# Altium PCB LEDs.PcbDoc
Units mm, origin at the board's own origin, x right, y up, seen from the top; angles counter-clockwise.
Board outline 152.4 x 101.6 mm, 2 copper layers (Top Layer, Bottom Layer); 18 components, 31 nets, 90 pads, 0 vias.
Unrouted connection lines stored in the file: 1.
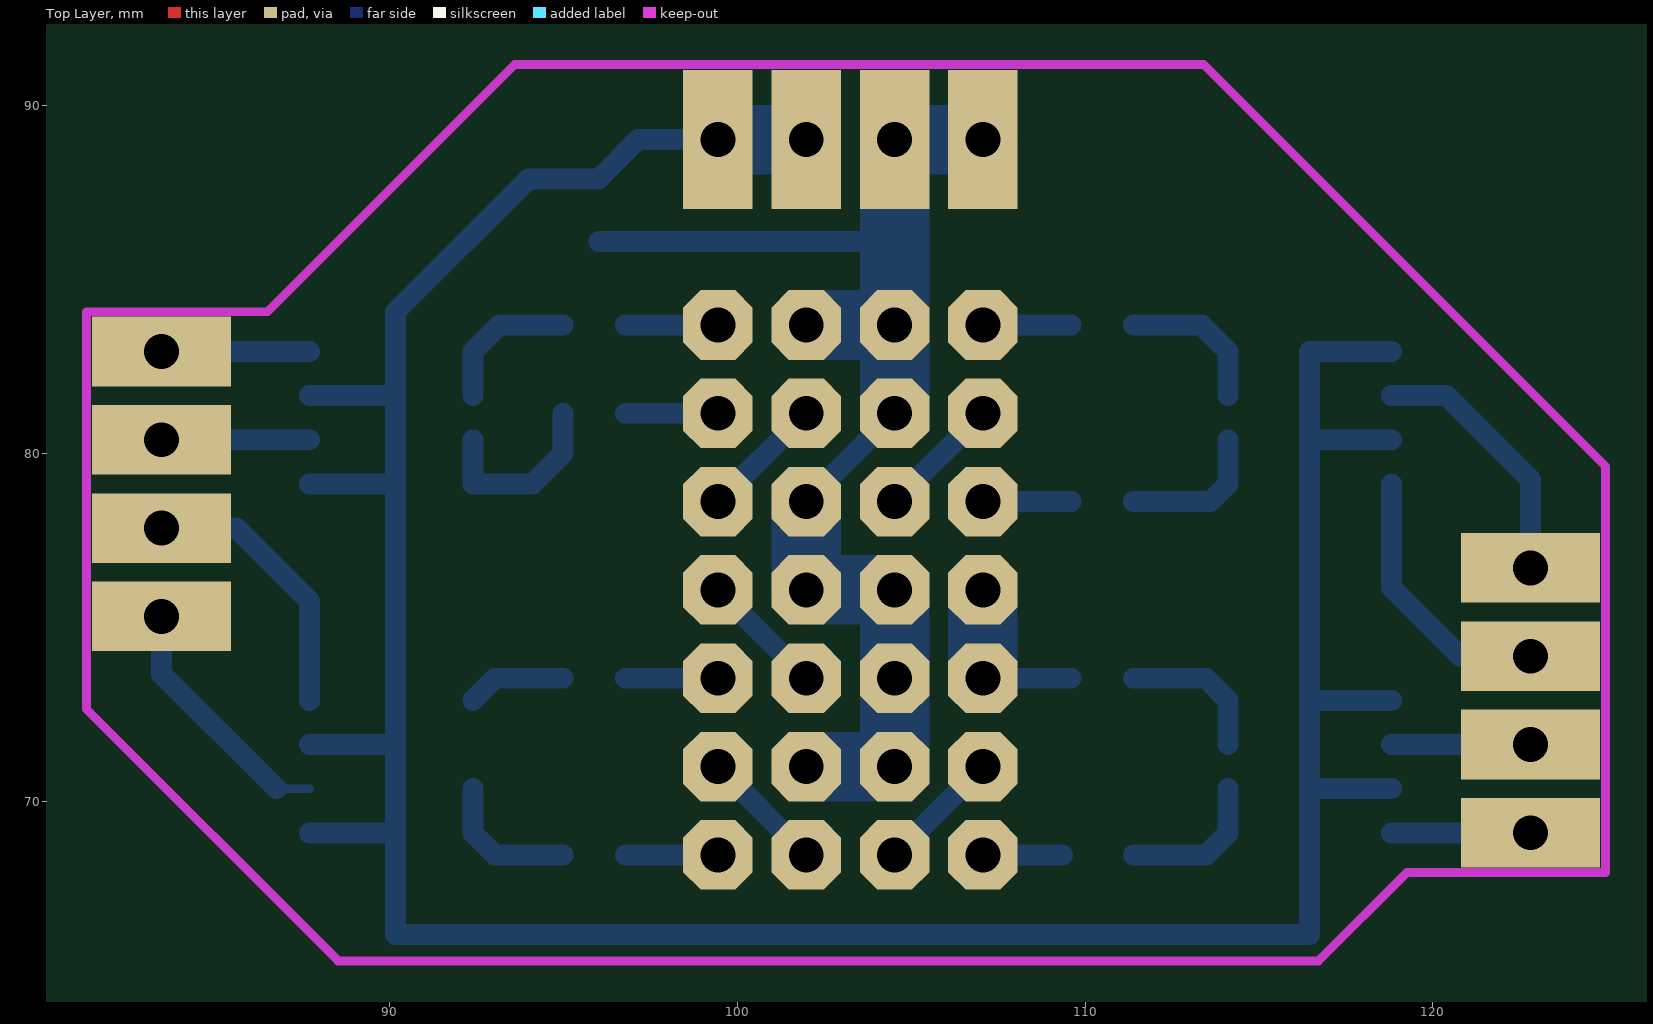
[diagram p0: Top Layer view]
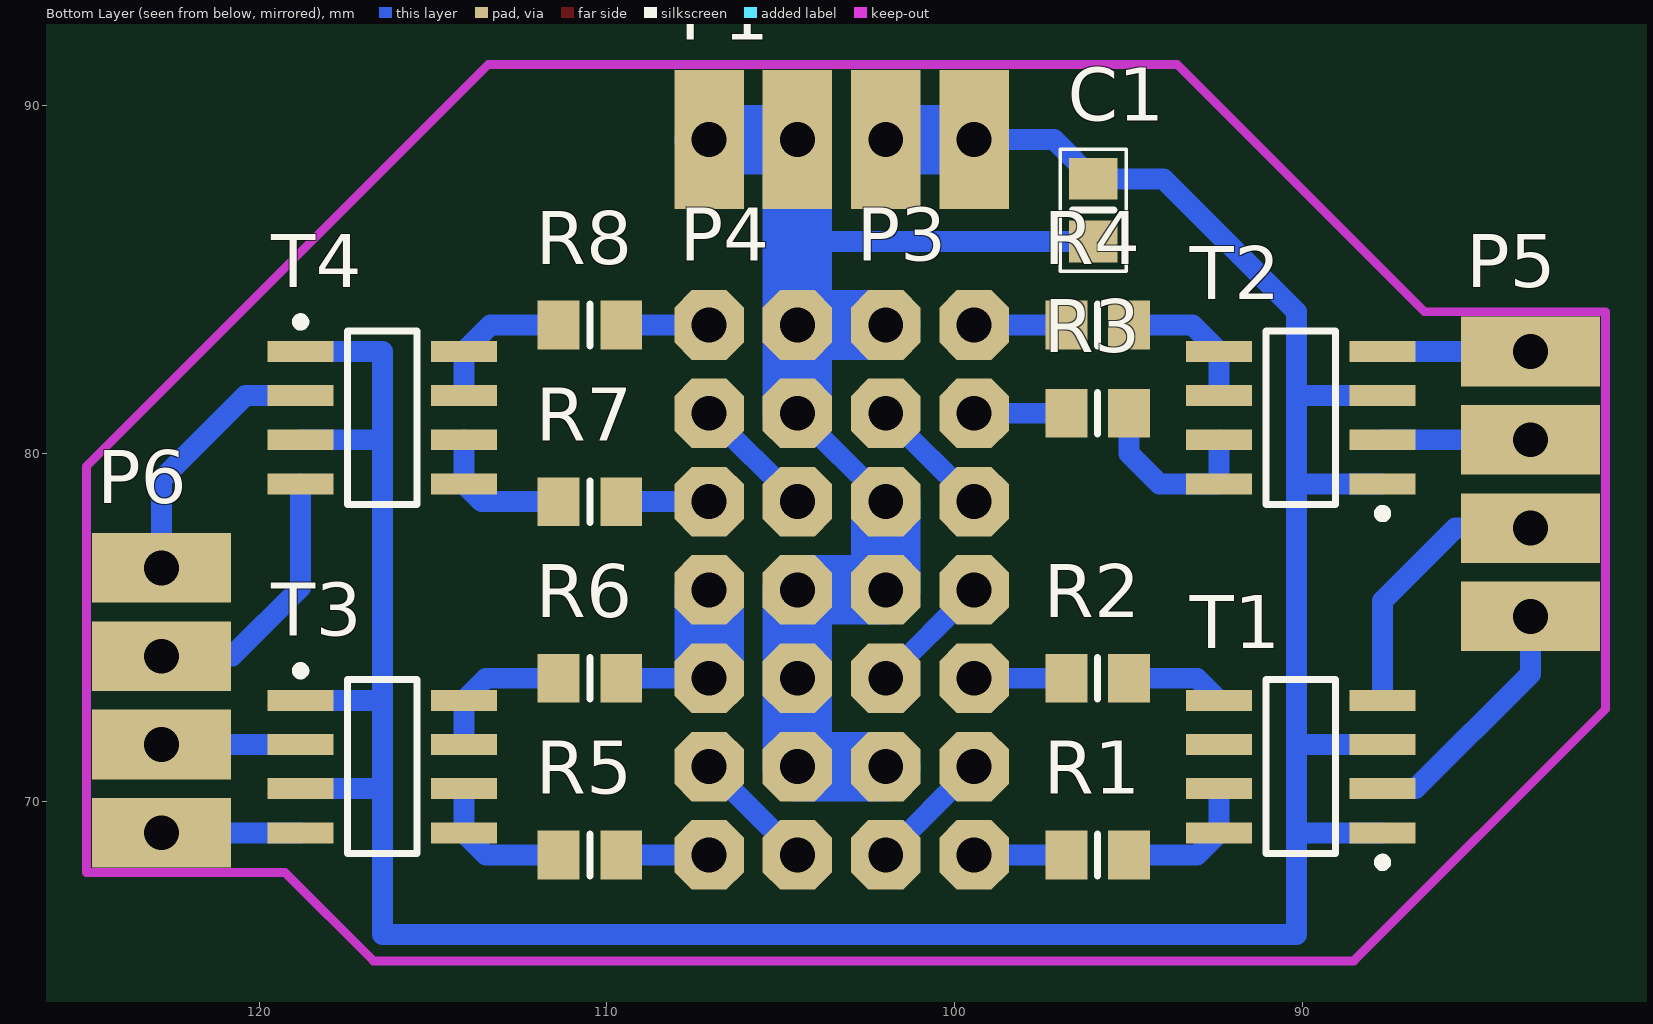
[diagram p1: Bottom Layer view, seen from below]
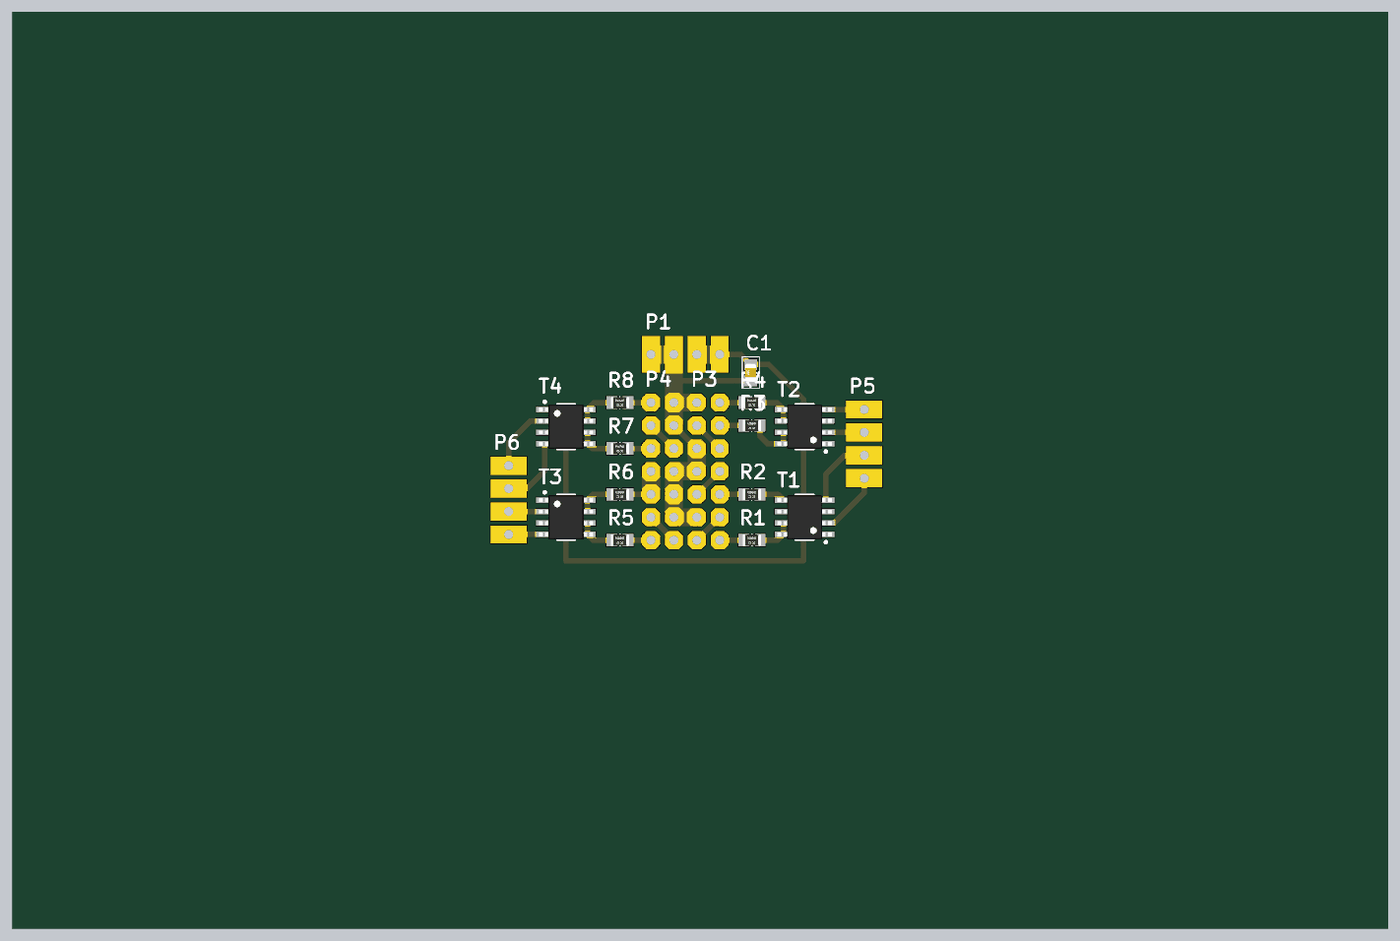
[diagram p2: 3D render of the assembled board from below, using the file's embedded part models]

## Layer stack, top to bottom
Top Solder: solder mask 0.0102, Solder Resist, Dk 3.5
Top Layer: signal copper 0.0356
Dielectric 1: dielectric 0.32, FR-4, Dk 4.8
Bottom Layer: signal copper 0.0356
Bottom Solder: solder mask 0.0102, Solder Resist, Dk 3.5

## Board outline
25.4,25.4 177.8,25.4 177.8,127 25.4,127

## Design rules (kind name [scope] priority, off if disabled: settings)
Clearance [All] p1: gap=0.254
PolygonConnect [All] p1: connectstyle=Relief reliefconductorwidth=0.254 reliefentries=4 polygonreliefangle="90 Angle" airgapwidth=0.254
RoomDefinition LEDs [InComponentClass('LEDs')] p1: confinementstyle=ConfineIn formatcopy=TRUE lockcomponents=FALSE outline 0,0 50.8,0 50.8,25.4 0,25.4
RoutingVias [All] p1: holewidth=0.711 width=1.27 viastyle="Through Hole" minholewidth=0.711 minwidth=1.27 maxholewidth=0.711 maxwidth=1.27
SolderMaskExpansion [All] p1: expansion=0.102
UnpouredPolygon [All] p1: allowunpoured=FALSE
Width [All] p1: maxlimit=3 minlimit=0.2 preferedwidth=0.6
29 further rules are at their usual default settings.

## Components (designator, comment, footprint, x,y, rotation, side; value= is the part's Value field where it differs from the comment)
C1 "1uF" "C 0805 / 2012" 96.012,86.995 r90 bottom
P1 "Header 4x1" "HEADER 4X1 2.54MM" 104.521,89.027 r0 bottom
P3 "Header 2x7" "HEADER 7X2 2.54MM" 99.441,73.533 r90 bottom
P4 "Header 2x7" "HEADER 7X2 2.54MM" 104.521,73.533 r90 bottom
P5 "Header 4x1" "HEADER 4X1 2.54MM" 83.439,80.391 r90 bottom
P6 "Header 4x1" "HEADER 4X1 2.54MM" 122.809,74.168 r90 bottom
R1 "100R" "R 0805 / 2012" 95.885,68.453 r0 bottom
R2 "62R" "R 0805 / 2012" 95.885,73.533 r0 bottom
R3 "82R" "R 0805 / 2012" 95.885,81.153 r0 bottom
R4 "68R" "R 0805 / 2012" 95.885,83.693 r0 bottom
R5 "82R" "R 0805 / 2012" 110.49,68.453 r0 bottom
R6 "68R" "R 0805 / 2012" 110.49,73.533 r0 bottom
R7 "160R" "R 0805 / 2012" 110.49,78.613 r0 bottom
R8 "68R" "R 0805 / 2012" 110.49,83.693 r0 bottom
T1 "IRF7341" SOIC8 90.043,70.993 r0 bottom
T2 "IRF7341" SOIC8 90.043,81.026 r0 bottom
T3 "IRF7341" SOIC8 116.459,70.993 r180 bottom
T4 "IRF7341" SOIC8 116.459,81.026 r180 bottom

## Footprints (in the part's own frame and the unit in brackets; to place one, negate y for a bottom-side part, rotate by r counter-clockwise, add the part's x,y. Pads: shape width x height; smd on the part's side, far side on the other; paste and mask are expansions set on the pad)
"C 0805 / 2012" [mm] "Capacitor 0805 / 2012 (2.0 x 1.2 mm)"
  rect 1.2x1.4 smd: 1(-0.9,0) 2(0.9,0)
  silkscreen extent -1.75,-0.95 1.75,0.95, body extent -1,-0.62 1,0.63, height 0.78
"HEADER 4X1 2.54MM" [mm]
  rect 2x4 hole 1: 1(-5.08,0) 2(-2.54,0) 3(0,0) 4(2.54,0)
"HEADER 7X2 2.54MM" [mm]
  oct 2x2 hole 1: 1(-5.08,0) 2(-5.08,2.54) 3(-2.54,0) 4(-2.54,2.54) 5(0,0) 6(0,2.54) 7(2.54,0) 8(2.54,2.54) 9(5.08,0) 10(5.08,2.54) 11(7.62,0) 12(7.62,2.54) 13(10.16,0) 14(10.16,2.54)
"R 0805 / 2012" [mm] "Resistor 0805 / 2012 (2.0 x 1.2 mm)"
  rect 1.2x1.4 smd: 1(-0.9,0) 2(0.9,0)
  silkscreen extent 0,-0.6 0,0.6, body extent -1,-0.63 1,0.62, height 0.45
SOIC8 [mm] "SOIC, 8-Leads, Body 4.9x3.9mm, Pitch 1.27mm, IPC High Density"
  rect 1.9x0.6 smd: 1(-2.35,1.905) 2(-2.35,0.635) 3(-2.35,-0.635) 4(-2.35,-1.905) 5(2.35,-1.905) 6(2.35,-0.635) 7(2.35,0.635) 8(2.35,1.905)
  silkscreen extent -2.47,-2.5 1,2.88, body extent -3,-2.45 3,2.45, height 1.75

## Part data
C1: library part Capacitor
R1 R2 R3 R4 R5 R6 R7 R8: library part Resistor, "Resistor"

## Nets (pads, with @x,y where several pads share a name; then routed paths per layer and width w, separated by ;. In a path a pad name is that pad's centre, name@x,y a point inside that pad or via, vN(x,y) a via of type N, cw(c..) or ccw(c..) an arc to the next point about the centre after c; other vN are vias at no path point)
BLUE: P4.6 P4.8 R6.1 | length 5.1
  Bottom Layer w0.6: P4.6 R6.1
  Bottom Layer w2: P4.6 P4.8
"DRAIN BLUE": R6.2 T3.7 T3.8 | length 4.3
  Bottom Layer w0.6: R6.2 113.474,73.533 T3.8 T3.7
"DRAIN RED": R7.2 T4.5 T4.6 | length 4.2
  Bottom Layer w0.6: R7.2 113.601,78.613 T4.5 T4.6
"DRAIN WHITE 2": R8.2 T4.7 T4.8 | length 4.3
  Bottom Layer w0.6: R8.2 113.347,83.693 T4.8 T4.7
"DRAIN YELLOW 2": R5.2 T3.5 T3.6 | length 4.3
  Bottom Layer w0.6: R5.2 113.474,68.453 T3.5 T3.6
GND: C1.2 P1.1 P1.2 T1.1 T1.3 T2.1 T2.3 T3.1 T3.3 T4.1 T4.3 | length 94
  Bottom Layer w0.254: 116.459,82.931 116.586,82.931
  Bottom Layer w0.6: T1.1 90.17,69.088 ; T1.3 90.17,71.628 ; T2.1 90.043,79.121 ; T2.3 90.17,81.661 ; P1.1 97.144,89.027 C1.2 93.991,87.895 90.17,84.074 90.17,66.167 116.459,66.167 116.459,82.931 ; 116.459,70.358 T3.3 ; 116.459,72.898 T3.1 ; 116.459,80.391 T4.3 ; 116.586,82.931 T4.1
  Bottom Layer w2: P1.1 P1.2
GREEN: P3.5 R2.2 | length 2.7
  Bottom Layer w0.6: R2.2 P3.5
LED1: P5.1 T1.2 | length 7.4
  Bottom Layer w0.254: P5.1@83.82,74.676 P5.1@83.883,74.613 ; 86.741,70.358 T1.2
  Bottom Layer w0.6: P5.1 83.439,73.66 86.741,70.358
LED2: P5.2 T1.4 | length 8
  Bottom Layer w0.6: P5.2 85.598,77.851 87.693,75.756 T1.4
LED3: P5.3 T2.2 | length 4.3
  Bottom Layer w0.6: P5.3 T2.2
LED4: P5.4 T2.4 | length 4.3
  Bottom Layer w0.6: P5.4 T2.4
LED5: P6.2 T3.2 | length 4
  Bottom Layer w0.6: T3.2 P6.2
LED6: P6.1 T3.4 | length 4
  Bottom Layer w0.6: T3.4 P6.1
LED7: P6.4 T4.2 | length 7.5
  Bottom Layer w0.6: T4.2 120.396,81.661 122.809,79.248 P6.4
LED8: P6.3 T4.4 | length 7.8
  Bottom Layer w0.6: T4.4 118.809,76.136 120.777,74.168 P6.3
NetP3_2: P3.2 P3.3 | length 3.6
  Bottom Layer w0.6: P3.3 P3.2
NetP3_6: P3.6 P3.7 | length 3.6
  Bottom Layer w0.6: P3.7 P3.6
NetP3_9: P3.9 P3.12 | length 3.6
  Bottom Layer w0.6: P3.9 P3.12
NetP4_1: P4.1 P4.4 | length 3.6
  Bottom Layer w0.6: P4.1 P4.4
NetP4_9: P4.9 P4.12 | length 3.6
  Bottom Layer w0.6: P4.9 P4.12
NetR1_1: R1.1 T1.7 T1.8 | length 4.1
  Bottom Layer w0.6: T1.7 T1.8 93.028,68.453 R1.1
NetR2_1: R2.1 T1.5 T1.6 | length 2.9
  Bottom Layer w0.6: T1.5 93.028,73.533 R2.1
NetR3_1: R3.1 T2.7 T2.8 | length 5.4
  Bottom Layer w0.6: T2.7 T2.8 94.107,79.121 94.985,79.999 R3.1
NetR4_1: R4.1 T2.5 T2.6 | length 4.2
  Bottom Layer w0.6: T2.6 T2.5 93.155,83.693 R4.1
RED: P4.10 R7.1 | length 2.5
  Bottom Layer w0.6: P4.10 R7.1
"RED BRIGHT": P3.1 R1.2 | length 2.7
  Bottom Layer w0.6: R1.2 P3.1
VCC: C1.1 P1.3 P1.4 P3.4 P3.8 P3.10 P3.14 P4.3 P4.5 P4.7 P4.11 P4.13 | length 37.8
  Bottom Layer w0.254: 104.51,86.095 104.521,86.106
  Bottom Layer w0.6: C1.1 104.51,86.095 ; P3.10 P4.11
  Bottom Layer w2: P3.4 P4.3 P4.5 P4.7 P3.8 P3.10 ; P3.14 P4.13 ; P4.11 P4.13 ; P1.4 P1.3 P4.13
"WHITE 1": P3.13 R4.2 | length 2.7
  Bottom Layer w0.6: R4.2 P3.13
"WHITE 2": P4.14 R8.1 | length 2.5
  Bottom Layer w0.6: P4.14 R8.1
"YELLOW 1": P3.11 R3.2 | length 2.7
  Bottom Layer w0.6: R3.2 P3.11
"YELLOW 2": P4.2 R5.1 | length 2.3
  Bottom Layer w0.6: P4.2 R5.1@109.347,68.453

## Keep-outs
Keep-Out Layer:
  lines w0.254: 81.28,72.644 88.519,65.405 116.713,65.405 119.253,67.945 124.968,67.945 124.968,79.629 113.411,91.186 110.49,91.186 96.139,91.186 93.599,91.186 86.487,84.074 81.28,84.074 81.28,72.644